# Altium PCB home.PcbDoc
Units mm, origin at the board's own origin, x right, y up, seen from the top; angles counter-clockwise.
Board outline 49.15 x 35.56 mm, 2 copper layers (Top Layer, Bottom Layer); 21 components, 17 nets, 73 pads, 14 vias.
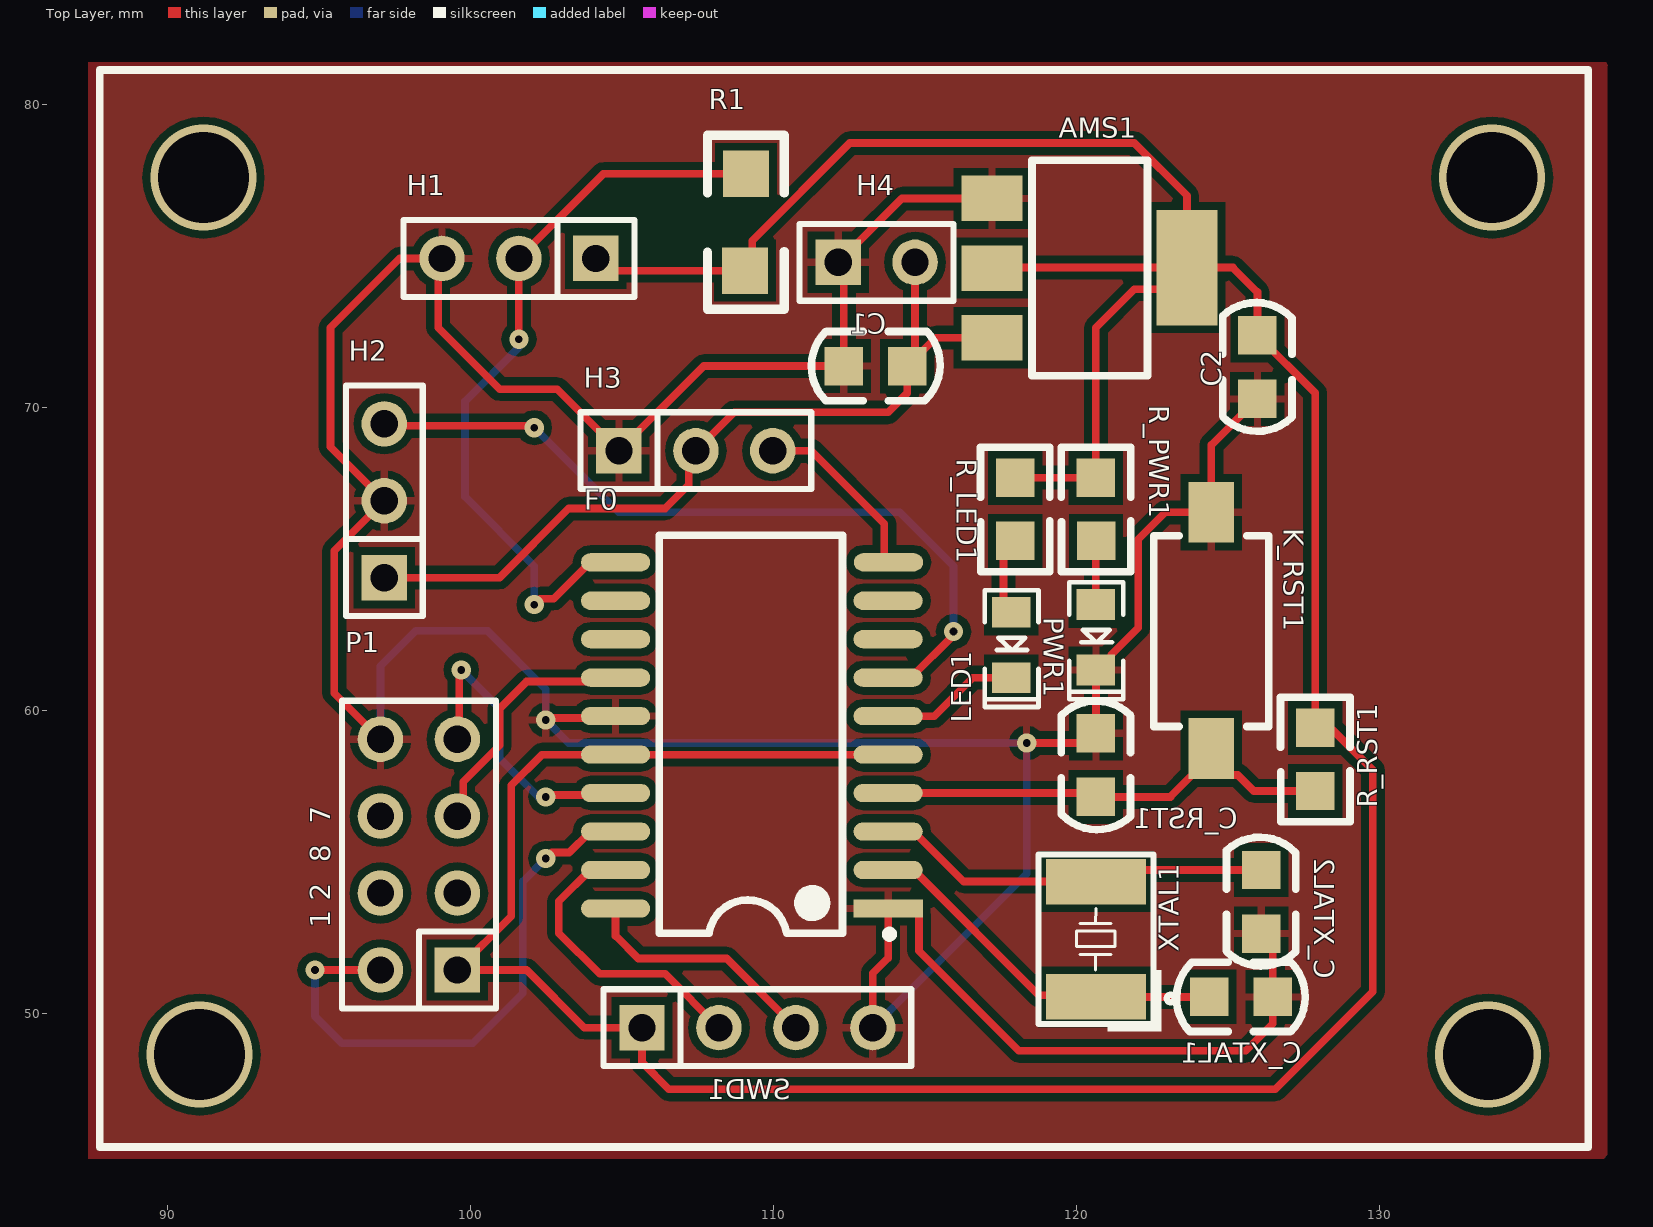
[diagram p0: Top Layer view]
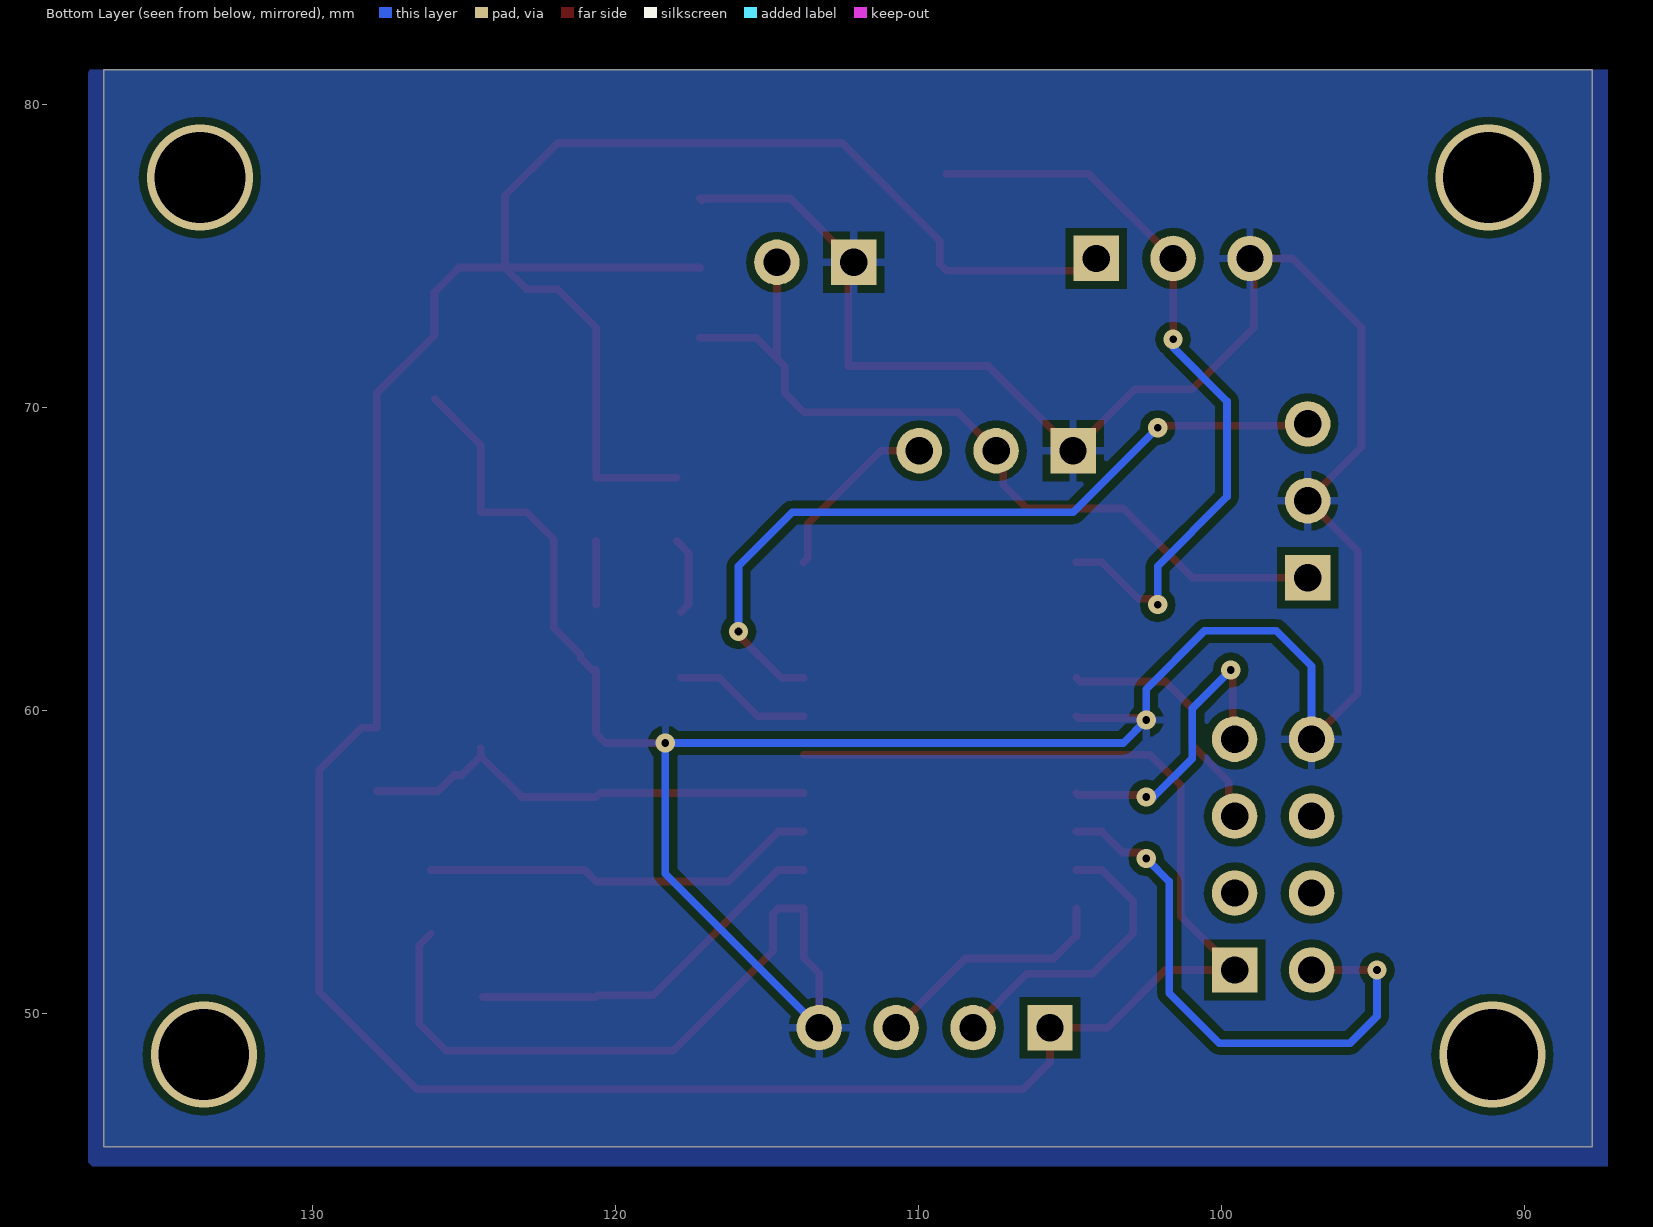
[diagram p1: Bottom Layer view, seen from below]
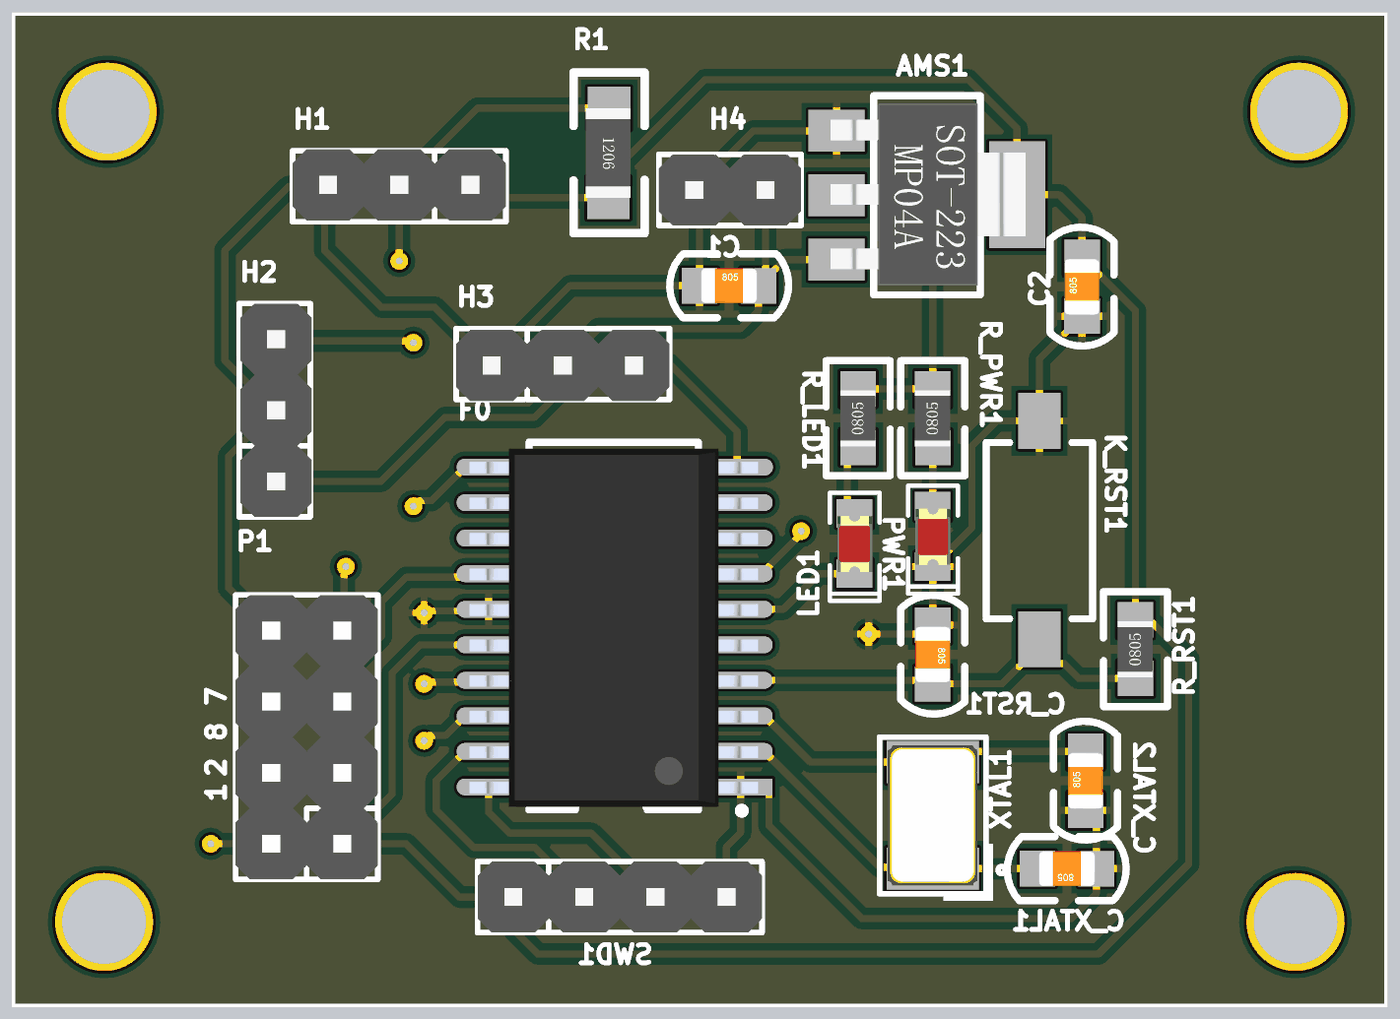
[diagram p2: 3D render of the assembled board from above, using the file's embedded part models]

## Layer stack, top to bottom
Top Solder: solder mask 0.0102, Solder Resist, Dk 3.5
Top Layer: signal copper 0.0356
Dielectric 1: dielectric 0.32, FR-4, Dk 4.8
Bottom Layer: signal copper 0.0356
Bottom Solder: solder mask 0.0102, Solder Resist, Dk 3.5

## Board outline
87.757,45.593 87.757,81.153 136.906,81.153 136.906,45.593

## Design rules (kind name [scope] priority, off if disabled: settings)
Clearance [All] p1: gap=0.254 ignorepadtopadclearanceinfootprint=FALSE except(0: Arc-Hole Track-Hole SMDPad-Hole THPad-Hole Via-Hole Fill-Hole Poly-Hole Region-Hole Text-Hole)
PolygonConnect [All] p1: connectstyle=Relief reliefconductorwidth=0.254 reliefentries=4 polygonreliefangle="90 Angle" airgapwidth=0.254
RoutingVias [All] p1: holewidth=0.711 width=1.27 viastyle="Through Hole" minholewidth=0.711 minwidth=1.27 maxholewidth=0.711 maxwidth=1.27
SolderMaskExpansion [All] p1: expansion=0.102 istentingtop=FALSE
Width [All] p1: maxlimit=0.254 minlimit=0.254 preferedwidth=0.254
30 further rules are at their usual default settings.

## Classes and differential pairs
component class Sheet2: AMS1 C1 C2 C_XTAL1 C_XTAL2 F0 H1 H2 H3 H4 K_RST1 LED1 P1 PWR1 R1 R_LED1 R_PWR1 R_RST1 XTAL1

## Components (designator, comment, footprint, x,y, rotation, side; value= is the part's Value field where it differs from the comment)
AMS1 "AMS-1117" SOT-223 120.523,74.676 r270 top
C1 "10u" C0805 112.326,71.377 r0 top
C2 "104" C0805 125.981,70.289 r90 top
C_RST1 "104" C0805 120.653,59.251 r270 top
C_XTAL1 "22p" C0805 126.492,50.546 r180 top
C_XTAL2 "22p" C0805 126.108,52.636 r90 top
F0 "stm32f030f4" SOP20 113.792,53.467 r180 top
H1 "Header" HDR1X3 104.14,74.93 r180 top
H2 "Header" HDR1X3 97.155,64.389 r90 top
H3 "Header" HDR1X3 104.902,68.58 r0 top
H4 "Header" HDR1X2 112.141,74.803 r0 top
K_RST1 "KEY-2" KEY-SMD1 124.46,58.748 r90 top
LED1 "LED-SMD" LED0805R 117.856,63.246 r270 top
P1 "Header 4X2" HDR2X4 99.568,51.435 r90 top
PWR1 "LED-SMD" LED0805R 120.65,63.5 r270 top
R1 "RES" R1206 109.093,77.724 r270 top
R_LED1 "1k" R0805 117.988,65.601 r90 top
R_PWR1 "1k" R0805 120.655,65.601 r90 top
R_RST1 "1k" R0805 127.894,57.346 r90 top
SWD1 "Header" HDR1X4 105.664,49.53 r0 top
XTAL1 "XTAL-2" XTAL-5032-2 120.65,52.451 r90 top

## Footprints (in the part's own frame and the unit in brackets; to place one, negate y for a bottom-side part, rotate by r counter-clockwise, add the part's x,y. Pads: shape width x height; smd on the part's side, far side on the other; paste and mask are expansions set on the pad)
C0805 [mm]
  rect 1.27x1.27 smd: 1(0,0) 2(2.101,-0.003)
  silkscreen extent -1.07,-1.14 3.18,1.14, body extent 0.05,-0.62 2.05,0.63, height 0.77
HDR1X2 [mm] "Connector; Header; 2 Position"
  rect 1.5x1.5 hole 0.9: 1(0,0)
  round 1.5 hole 0.9: 2(2.54,0)
  silkscreen extent -1.27,-1.27 3.81,1.27, body extent -1.27,-1.27 3.81,1.27, height 8.54
HDR1X3 [mm] "Connector; Header; 3 Position"
  rect 1.5x1.5 hole 0.9: 1(0,0)
  round 1.5 hole 0.9: 2(2.54,0) 3(5.08,0)
  silkscreen extent -1.27,-1.27 6.35,1.27, body extent -1.27,-1.32 6.35,1.22, height 8.54
HDR1X4 [mm] "Connector; Header; 4 Position"
  rect 1.5x1.5 hole 0.9: 1(0,0)
  round 1.5 hole 0.9: 2(2.54,0) 3(5.08,0) 4(7.62,0)
  silkscreen extent -1.27,-1.27 8.89,1.27, body extent -1.26,-1.27 8.9,1.27, height 8.54
HDR2X4 [mm] "Connector; Header; 4x2 Position"
  rect 1.5x1.5 hole 0.9: 1(0,0)
  round 1.5 hole 0.9: 2(0,2.54) 3(2.54,0) 4(2.54,2.54) 5(5.08,0) 6(5.08,2.54) 7(7.62,0) 8(7.62,2.54)
  silkscreen extent -1.27,-1.27 8.89,3.81, body extent -1.27,-1.27 8.89,3.81, height 8.54
KEY-SMD1 [mm]
  rect 2x1.5 smd: 1(0,0) 2(7.8,0)
  silkscreen extent 0.73,-1.9 7.03,1.9, body extent -0.06,-1.94 7.83,1.91, height 2.5
LED0805R [mil]
  rect 40x50 smd: 1(0,0) 2(85,0)
  silkscreen extent -29,-35 123,35, body extent 3,-24 83,25, height 43
R0805 [mm] "1/8W"
  rect 1.27x1.27 smd: 1(0,0) 2(2.09,0.005)
  silkscreen extent -1.01,-1.14 3.1,1.15, body extent 0.04,-0.62 2.04,0.64, height 0.55
R1206 [mil] "1/4W"
  rect 60x60 smd: 1(0,0) 2(126,-1)
  silkscreen extent -50,-50 176,50, body extent 0,-32 126,30, height 24
SOP20 [mm]
  rect 2.286x0.6 smd: 1(0,0)
  oval 2.286x0.6 smd: 2(0,-1.27) 3(0,-2.54) 4(0,-3.81) 5(0,-5.08) 6(0,-6.35) 7(0,-7.62) 8(0,-8.89) 9(0,-10.16) 10(-0.01,-11.43) 11(8.999,-11.43) 12(8.999,-10.16) 13(8.999,-8.89) 14(8.999,-7.62) 15(8.999,-6.35) 16(8.999,-5.08) 17(8.999,-3.81) 18(8.999,-2.54) 19(8.999,-1.27) 20(8.999,0)
  silkscreen extent -0.17,-12.32 7.56,0.97, body extent -0.62,-12.09 9.68,0.71, height 2.7
SOT-223 [mil]
  rect 59x79 smd: 1(-88,-130) 2(2.55,-130) 3(93.1,-130)
  rect 150x79 smd: 2(1.88,123.54)
  silkscreen extent -137,-78 143,72, body extent -126,-139 130,135, height 67
XTAL-5032-2 [mm]
  rect 1.5x3.3 smd: 1(-1.905,0) 2(1.905,0)
  silkscreen extent -3.05,-2.59 2.8,1.9, body extent -2.5,-1.6 2.5,1.6, height 1

## Part data
AMS1: "线性稳压器"
C1 C2 C_RST1 C_XTAL1 C_XTAL2: library part CAP-NPL-SMD, "贴片电容（无极性）"
H1 H2 H3: library part Header-3
H4: library part Header-2
K_RST1: "按键/轻触开关"
LED1 PWR1: "贴片LED", Manufacturer="Generic Components", Class=Optoelectronic, Published=08/06/2000, Publisher="Altium Hobart Technology Centre", SubClass=LED
P1: "Header, 4-Pin, Dual row", LatestRevisionDate=17-Jul-2002, LatestRevisionNote="Re-released for DXP Platform.", Publisher="Altium Limited"
R1: "电阻", =10K
R_LED1 R_PWR1 R_RST1: library part RES, "电阻", =10K
SWD1: library part Header-4
XTAL1: "晶体振荡器"

## Via types
v1: diameter 0.635, hole 0.254, Top Layer to Bottom Layer, 10 vias
v2: diameter 3.5, hole 3, Top Layer to Bottom Layer, 4 vias

## Nets (pads, with @x,y where several pads share a name; then routed paths per layer and width w, separated by ;. In a path a pad name is that pad's centre, name@x,y a point inside that pad or via, vN(x,y) a via of type N, cw(c..) or ccw(c..) an arc to the next point about the centre after c; other vN are vias at no path point)
5V: AMS1.3 C1.2 H2.1 H3.2 H4.2 | length 27.9
  Top Layer w0.254: H2.1 100.959,64.389 103.245,66.675 106.426,66.675 107.204,67.453 107.204,68.342 H3.2 108.712,69.85 113.792,69.85 114.427,70.485 C1.2 C1.2@114.681,71.628 ; H4.2 C1.2@114.681,71.628 ; H4.2@114.935,74.93 H4.2@115.173,75.168 ; AMS1.3 115.364,72.311 C1.2@114.681,71.628
DS18: F0.11 H1.2 R1.1 | length 25
  Top Layer w0.254: v1(101.6,72.263) H1.2 104.394,77.724 R1.1 ; v1(102.108,63.5) 102.302,63.694 102.747,63.694 103.95,64.897 F0.11
  Bottom Layer w0.254: v1(101.6,72.263) 101.6,71.988 99.822,70.21 99.822,67.056 102.108,64.77 v1(102.108,63.5)
EN: F0.14 P1.5 | length 8.4
  Top Layer w0.254: P1.5 99.758,56.705 99.758,57.646 100.965,58.853 100.965,60.071 101.854,60.96 104.666,60.96 F0.14
GND: AMS1.1 C1.1 C2.1 C_RST1.1 C_XTAL1.1 C_XTAL2.1 F0.1 F0.15 H1.3 H2.2 H3.1 H4.1 K_RST1.2 P1.8 PWR1.2 SWD1.4 | length 128.3
  Top Layer w0.254: P1.8 95.504,60.579 95.504,65.278 H2.2 95.377,68.707 95.377,72.644 97.663,74.93 H1.3 98.933,74.803 98.933,72.644 100.965,70.612 102.87,70.612 H3.1 107.699,71.377 C1.1 112.326,74.618 H4.1 114.249,76.911 AMS1.1 AMS1.1@117.145,76.835 ; v1(102.489,59.69) 102.552,59.753 104.729,59.753 F0.15 ; SWD1.4 113.284,51.327 113.792,51.835 F0.1 114.635,53.467 114.808,53.294 114.808,52.07 118.11,48.768 125.603,48.768 126.492,49.657 C_XTAL1.1 126.492,52.253 C_XTAL2.1 ; v1(118.364,58.928) 120.33,58.928 C_RST1.1 120.653,61.338 PWR1.2 120.777,61.341 121.158,61.722 121.158,61.849 122.047,62.738 122.047,65.659 122.936,66.548 K_RST1.2 124.46,68.768 C2.1
  Bottom Layer w0.254: P1.8 97.028,61.468 98.193,62.633 100.562,62.633 102.489,60.706 v1(102.489,59.69) 103.251,58.928 v1(118.364,58.928) 118.364,54.61 SWD1.4
IR: F0.7 H2.3 | length 25.8
  Top Layer w0.254: H2.3 97.218,69.406 102.044,69.406 v1(102.108,69.342) ; F0.7 114.541,61.087 115.951,62.497 v1(115.951,62.611)
  Bottom Layer w0.254: v1(102.108,69.342) 102.108,69.335 104.895,66.548 114.173,66.548 115.951,64.77 v1(115.951,62.611)
LED: F0.6 LED1.2 | length 4.6
  Top Layer w0.254: F0.6 115.316,59.817 116.586,61.087 LED1.2
NetLED1_1: LED1.1 R_LED1.1 | length 2.6
  Top Layer w0.254: LED1.1 117.602,63.5 117.602,65.215 R_LED1.1
NetPWR1_1: PWR1.1 R_PWR1.1 | length 2.1
  Top Layer w0.254: PWR1.1 120.65,65.596 R_PWR1.1
NRST: C_RST1.2 F0.4 K_RST1.1 R_RST1.1 | length 15.4
  Top Layer w0.254: F0.4 120.523,57.277 C_RST1.2 123.112,57.15 K_RST1.1@124.46,58.498 ; K_RST1.1 K_RST1.1@124.46,58.498 ; R_RST1.1 125.862,57.346 125.333,57.875 125.083,57.875 K_RST1.1@124.46,58.498
RX: F0.18 P1.2 | length 19
  Top Layer w0.254: v1(94.869,51.435) P1.2 ; v1(102.489,55.118) 102.683,55.312 103.255,55.312 103.95,56.007 F0.18
  Bottom Layer w0.254: v1(94.869,51.435) 94.869,49.911 95.758,49.022 100.076,49.022 101.727,50.673 101.727,54.356 v1(102.489,55.118)
steer: F0.10 H3.3 | length 6
  Top Layer w0.254: H3.3 111.252,68.58 113.665,66.167 113.665,65.034 F0.10
SWCLK: F0.20 SWD1.3 | length 8.1
  Top Layer w0.254: F0.20 104.793,52.56 105.537,51.816 108.458,51.816 SWD1.3
SWDIO: F0.19 SWD1.2 | length 9.9
  Top Layer w0.254: F0.19 103.95,54.737 102.921,53.708 102.921,52.654 104.267,51.308 106.426,51.308 SWD1.2
TX: F0.17 P1.7 | length 10.2
  Top Layer w0.254: P1.7 99.632,59.118 99.632,61.277 v1(99.695,61.341) ; v1(102.489,57.15) 102.552,57.213 104.729,57.213 F0.17
  Bottom Layer w0.254: v1(99.695,61.341) 100.965,60.071 100.965,58.42 102.235,57.15 v1(102.489,57.15)
VCC: AMS1.2 C2.2 F0.5 F0.16 H1.1 P1.1 R1.2 R_LED1.2 R_PWR1.2 R_RST1.2 SWD1.1 | length 124.1
  Top Layer w0.254: H1.1 104.546,74.524 R1.2 109.3,74.756 109.3,75.518 112.522,78.74 121.92,78.74 123.661,76.999 AMS1.2@123.661,74.628 ; F0.5 F0.16 102.362,58.547 101.346,57.531 101.346,53.213 P1.1 101.854,51.435 103.759,49.53 SWD1.1 105.664,48.387 106.553,47.498 126.575,47.498 129.794,50.717 129.794,58.039 128.397,59.436 R_RST1.2 127.889,70.485 C2.2 125.984,73.818 125.174,74.628 AMS1.2@123.661,74.628 ; AMS1.2@117.221,74.611 117.238,74.628 AMS1.2@123.661,74.628 ; R_LED1.2 R_PWR1.2 120.65,72.644 121.92,73.914 122.947,73.914 AMS1.2@123.661,74.628
XTAL1: C_XTAL1.2 F0.2 XTAL1.1 | length 12.3
  Top Layer w0.254: F0.2 114.635,54.737 118.768,50.604 120.592,50.604 XTAL1.1 124.389,50.546 C_XTAL1.2
XTAL2: C_XTAL2.2 F0.3 XTAL1.2 | length 13.2
  Top Layer w0.254: F0.3 114.635,56.007 116.286,54.356 XTAL1.2 121.031,54.737 C_XTAL2.2
pads on no net: F0.8 F0.9 F0.12 F0.13 P1.3 P1.4 P1.6
copper on no net:
  other v2: 91.059,48.641 133.604,48.641 91.186,77.597 133.731,77.597

## Polygon pours and split planes (outlines as drawn)
GND on Top Layer "GND_L01_P001" (solid, remove dead copper, pour order 1): 87.376,81.407 87.376,45.212 137.414,45.212 137.541,45.339 137.541,81.28 137.668,81.407
GND on Bottom Layer "GND_L02_P000" (solid, remove dead copper, pour order 0): 87.249,81.153 87.249,44.958 137.287,44.958 137.414,45.085 137.414,81.026 137.541,81.153

## Silkscreen, mask and mechanical layers (free items; w line width, h text height)
Top Overlay:
  lines w0.254: 87.757,45.593 87.757,81.153 136.906,81.153 136.906,80.899 136.906,45.593 87.757,45.593

## Text inside footprints (layer, text, board x,y; h text height)
P1: Top Overlay "8" at 95.377,54.991 h0.66 r90; Top Overlay "7" at 95.377,56.261 h0.66 r90; Top Overlay "1" at 95.377,52.832 h0.66 r90; Top Overlay "2" at 95.377,53.721 h0.66 r90